# Altium PCB BigStructuralPCB.PcbDoc
Units mm, origin at the board's own origin, x right, y up, seen from the top; angles counter-clockwise.
Board outline 440 x 55 mm, 2 copper layers (Top Layer, Bottom Layer); 15 components, 18 nets, 141 pads, 122 vias.
Unrouted connection lines stored in the file: 14.
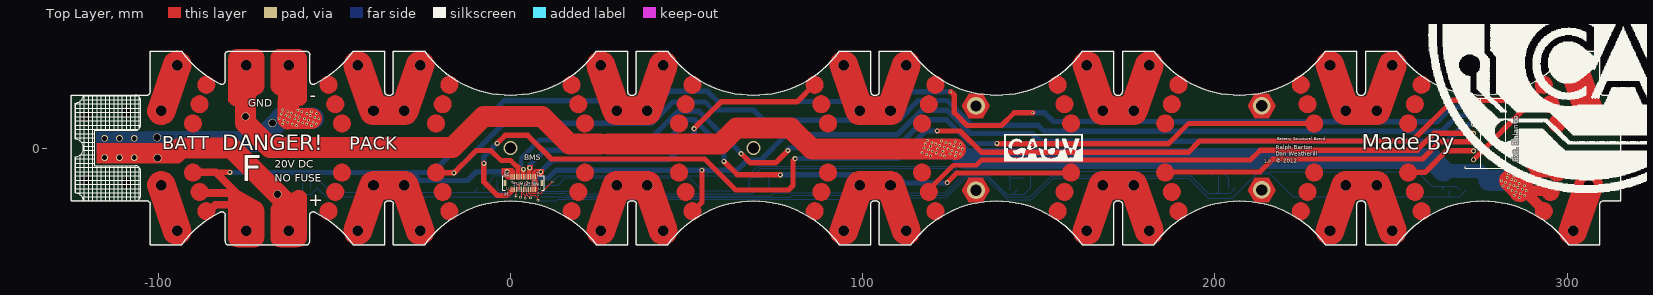
[diagram p0: Top Layer view]
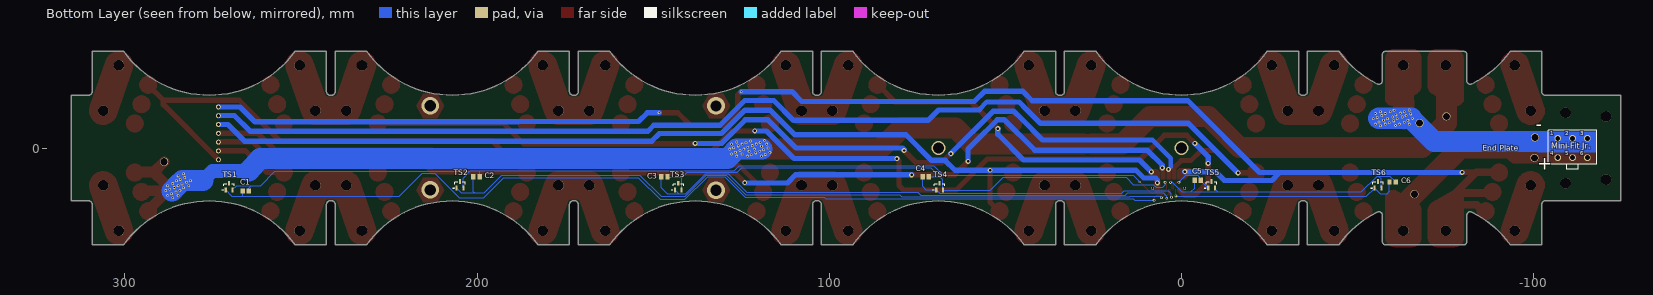
[diagram p1: Bottom Layer view, seen from below]

## Layer stack, top to bottom
Top Layer: signal copper 0.0356
Dielectric: dielectric 0.32, FR-4, Dk 4.8
Bottom Layer: signal copper 0.0356

## Board outline
657 vertices, not listed, extent -124.75,-27.5 315.25,27.5

## Design rules (kind name [scope] priority, off if disabled: settings)
Clearance [All] p1: gap=0.15
ComponentClearance [All] p1: gap=0.25 collisioncheckmode=3 verticalgap=0.25 showdistances=FALSE
HoleSize [All] p1: absolutevalues=TRUE maxlimit=10 minlimit=0.2 maxpercent=80.000 minpercent=20.000
HoleToHoleClearance [All] p1: gap=0.25 allowstackedmicrovias=TRUE
MinimumAnnularRing [All] p1: minimumring=0.15
MinimumSolderMaskSliver [All] p1: minsoldermaskwidth=0.125
PlaneClearance [All] p1: clearance=0.25
PlaneConnect [All] p1: planeconnectstyle=Relief reliefexpansion=0.5 reliefentries=4 reliefconductorwidth=0.25 reliefairgap=0.25
PolygonConnect [All] p1: connectstyle=Relief reliefconductorwidth=0.25 reliefentries=4 polygonreliefangle="90 Angle"
RoutingVias [All] p1: holewidth=0.3 width=0.6 viastyle="Through Hole" minholewidth=0.3 minwidth=0.6 maxholewidth=0.4 maxwidth=0.8
SilkToSilkClearance [All] p1: silktosilkclearance=0.25
SilkscreenOverComponentPads [All] p1: minsilkscreentomaskgap=0.125
SolderMaskExpansion [All] p1: expansion=0.125
Width "CAN Power" [InNet('CAN_POWER')] p1: maxlimit=10 minlimit=0.2 preferedwidth=2
Width Power [InNetClass('Power')] p2: maxlimit=10 minlimit=0.25 preferedwidth=0.5
Width General [All] p3: maxlimit=10 minlimit=0.2 preferedwidth=0.25
20 further rules are at their usual default settings.

## Classes and differential pairs
net class ReallyBigPower: BATT+ BATT- PACK+ PACK-
net class VoltSense: V1 V2 V3 V4 V5
net class TempSense: TSN1 TSN2 TSN3 TSP1 TSP2 TSP3 TSP4 TSP5 TSP6

## Components (designator, comment, footprint, x,y, rotation, side; value= is the part's Value field where it differs from the comment)
BMS "Comment" DF12-30DS-0.5V 3.666,-9.936 r180 top locked
C1 "" C0805 265.684,-12.192 r0 bottom
C2 "" C0805 200.152,-8.128 r0 bottom
C3 "" C0805 146.812,-8.128 r0 bottom
C4 "" C0805 72.644,-8.128 r0 bottom
C5 "" C0805 -4.572,-9.144 r0 bottom
C6 "" C0805 -59.944,-9.652 r180 bottom
"End Plate" "Comment" 39-28-1063 -106.806,2.764 r180 bottom
"Ext. Balance" "Comment" "JST XH 7 pin" 273.414,-3.332 r90 top
TS1 "Comment" SOT95P230X110-3N 270.366,-10.952 r90 bottom
TS2 "Comment" SOT95P230X110-3N 204.834,-10.444 r90 bottom
TS3 "Comment" SOT95P230X110-3N 142.858,-10.952 r90 bottom
TS4 "Comment" SOT95P230X110-3N 68.69,-10.952 r90 bottom
TS5 "Comment" SOT95P230X110-3N -8.526,-10.444 r90 bottom
TS6 "Comment" SOT95P230X110-3N -55.77,-10.444 r90 bottom

## Footprints (in the part's own frame and the unit in brackets; to place one, negate y for a bottom-side part, rotate by r counter-clockwise, add the part's x,y. Pads: shape width x height; smd on the part's side, far side on the other; paste and mask are expansions set on the pad)
39-28-1063 [mm] "MOLEX - 39-28-1063 - HEADER, MINI-FIT, 6WAY"
  round 1.9 hole 1.4: 1(0,0) 2(4.2,0) 3(8.4,0) PACK+(0,-5.5) PACK+(4.2,-5.5) PACK+(8.4,-5.5)
  silkscreen extent -2.72,-8.75 11.1,2.3, body extent -3.1,-8.75 11.5,2.25, height 12.8
C0805 [mm] "KEMET - C0805C104K5RACTU - CAPACITOR, 0805, 100NF, 50V, X7R"
  rect 1.25x1.5 smd: 1(-0.889,0) 2(0.861,0)
  body extent -1.12,-0.72 1.09,0.72, height 1
DF12-30DS-0.5V [mm] "HRS (HIROSE) - DF12-30DS-0.5V(86) - RECEPTACLE, 3.5-5MM HEIGHT, 30WAY"
  rect 0.25x1.6 smd mask+0.08: 1(-3.5,-1.8) 2(-3.5,1.8) 3(-3,-1.8) 4(-3,1.8) 5(-2.5,-1.8) 6(-2.5,1.8) 7(-2,-1.8) 8(-2,1.8) 9(-1.5,-1.8) 10(-1.5,1.8) 11(-1,-1.8) 12(-1,1.8) 13(-0.5,-1.8) 14(-0.5,1.8) 15(0,-1.8) 16(0,1.8) 17(0.5,-1.8) 18(0.5,1.8) 19(1,-1.8) 20(1,1.8) 21(1.5,-1.8) 22(1.5,1.8) 23(2,-1.8) 24(2,1.8) 25(2.5,-1.8) 26(2.5,1.8) 27(3,-1.8) 28(3,1.8) 29(3.5,-1.8) 30(3.5,1.8)
  rect 0.8x1.8 smd: ""(-5.2,0) ""(5.2,0)
  round 0.85 hole 0.6: ""(-4.55,1.5) ""(4.55,1.5)
  silkscreen extent -5.9,-2.1 5.9,2.1, body extent -5.3,-2.3 5.3,2.3, height 2.68
"JST XH 7 pin" [mil]
  round 55 hole 35: 1(0,0) 2(98.43,0) 3(196.85,0) 4(295.28,0) 5(393.7,0) 6(492.13,0) 7(590.55,0)
  silkscreen extent -94,-362 685,91
SOT95P230X110-3N [mm] "SOT23, 3-Leads, Body 3.0x2.5mm (max), Pitch 0.95mm, IPC Medium Density"
  rect 1.4x0.6 smd: 1(-0.95,0.95) 2(-0.95,-0.95) 3(0.95,0)
  silkscreen extent -1.07,-1.5 0.7,1.93, body extent -0.7,-1.5 0.7,1.5, height 1.1

## Free pads (board coordinates)
  round 3 hole 3: 1(-120.512,-9) 1(-120.512,9) 1(-109.012,-10) 1(-109.012,10) 1(-99.117,-10.595) 1(-99.117,10.595) 1(-94.645,-23.5) 1(-94.645,23.5) 1(-75.023,-23.5) 1(-75.023,23.5) 1(-62.977,-23.5) 1(-62.977,23.5) 1(-43.355,-23.5) 1(-43.355,23.5) 1(-38.883,-10.595) 1(-38.883,10.595) 1(-30.117,-10.595) 1(-30.117,10.595) 1(-25.645,-23.5) 1(-25.645,23.5) 1(25.645,-23.5) 1(25.645,23.5) 1(30.117,-10.595) 1(30.117,10.595) 1(38.883,-10.595) 1(38.883,10.595) 1(43.355,-23.5) 1(43.355,23.5) 1(94.645,-23.5) 1(94.645,23.5) 1(99.117,-10.595) 1(99.117,10.595) 1(107.883,-10.595) 1(107.883,10.595) 1(112.355,-23.5) 1(112.355,23.5) 1(163.645,-23.5) 1(163.645,23.5) 1(168.117,-10.595) 1(168.117,10.595) 1(176.883,-10.595) 1(176.883,10.595) 1(181.355,-23.5) 1(181.355,23.5) 1(232.645,-23.5) 1(232.645,23.5) 1(237.117,-10.595) 1(237.117,10.595) 1(245.883,-10.595) 1(245.883,10.595) 1(250.355,-23.5) 1(250.355,23.5) 1(301.645,-23.5) 1(301.645,23.5) 1(306.117,-10.595) 1(306.117,10.595)
  round 2.3 hole 2: 1(-100.3,3) 1(-100.2,-2.8) 1(-75.193,9) 1(-67.6,7.1) 1(-66.11,-13.118) 1(288.8,-3.9)
  round 4 hole 3: 1(0,0) 1(69,0)

## Via types
v1: diameter 0.8, hole 0.4, Top Layer to Bottom Layer, tented both sides, 98 vias
v2: diameter 1.4, hole 0.7, Top Layer to Bottom Layer, tented both sides, 17 vias
v3: diameter 5, hole 3.2, Top Layer to Bottom Layer, tented both sides, 4 vias
v4: diameter 1.4, hole 0.7, Top Layer to Bottom Layer, 2 vias
v5: diameter 0.6, hole 0.3, Top Layer to Bottom Layer, tented both sides, 1 vias

## Nets (pads, with @x,y where several pads share a name; then routed paths per layer and width w, separated by ;. In a path a pad name is that pad's centre, name@x,y a point inside that pad or via, vN(x,y) a via of type N, cw(c..) or ccw(c..) an arc to the next point about the centre after c; other vN are vias at no path point)
BATT+: "Ext. Balance.7" BMS.25 BMS.27 BMS.29 pad.1@-75.023,-23.5 | length 447.3
  Top Layer w1.5: -83.708,-6.895 -79.705,-6.895 v2(-79.675,-6.925) ; v1(125,16) 126,15 126,10 129.6,6.4 139.4,6.4 143,10 v1(148.3,10)
  Top Layer w2.2: -90.152,-6.895 -83.708,-6.895 -76.038,-14.565 ; -88.656,-12.801 -79.643,-12.801 -78.071,-14.373 ; -86.777,-17.173 -84.782,-17.173 -83.747,-16.138 -77.188,-16.138 -77.112,-16.214
  Bottom Layer w1.5: v2(-79.675,-6.925) -22.175,-6.925 -1.826,13.423 42.373,13.423 45.05,16.1 55.95,16.1 58.85,13.2 107.8,13.2 110.6,16 124.3,16 v1(125,16) ; -27.55,-7.3 -25.65,-9.2 -12.15,-9.2 -9.65,-6.7 v2(-0.95,-6.7) ; v1(148.3,10) 151.65,10 154.15,7.5 188.35,7.5 188.425,7.425 263.05,7.425 267.293,11.668 273.414,11.668
BATT-: "Ext. Balance.1" BMS.26 BMS.28 BMS.30 pad.1@288.8,-3.9 pad.1@-75.023,23.5 pad.1@-75.193,9 | length 919.9
  Top Layer w0.254: 283.563,-12.153 cw(c286.567,-12.153) 284.443,-10.028 ; 283.563,-12.153 cw(c286.567,-12.153) 284.443,-10.028 ; 283.563,-12.153 cw(c286.567,-12.153) 284.443,-10.028 ; 283.563,-12.153 cw(c286.567,-12.153) 284.443,-10.028 ; 283.563,-12.153 ccw(c286.567,-12.153) 289.207,-13.587 ; 283.563,-12.153 ccw(c286.567,-12.153) 289.207,-13.587 ; 283.563,-12.153 cw(c286.567,-12.153) 284.443,-10.028 ; 283.563,-12.153 ccw(c286.567,-12.153) 289.207,-13.587 ; 283.563,-12.153 ccw(c286.567,-12.153) 289.207,-13.587 ; 283.563,-12.153 ccw(c286.567,-12.153) 289.207,-13.587 ; 284.443,-10.028 cw(c286.567,-12.153) 288.692,-10.028 ; 284.443,-10.028 cw(c286.567,-12.153) 288.692,-10.028 ; 284.443,-10.028 cw(c286.567,-12.153) 288.692,-10.028 ; 284.443,-10.028 cw(c286.567,-12.153) 288.692,-10.028 ; 284.443,-10.028 cw(c286.567,-12.153) 288.692,-10.028 ; 288.692,-10.028 cw(c286.567,-12.153) 289.572,-12.153 ; 288.692,-10.028 cw(c286.567,-12.153) 289.572,-12.153 ; 288.692,-10.028 cw(c286.567,-12.153) 289.572,-12.153 ; 288.692,-10.028 cw(c286.567,-12.153) 289.572,-12.153 ; 288.692,-10.028 cw(c286.567,-12.153) 289.572,-12.153 ; 289.207,-13.587 ccw(c286.567,-12.153) 289.572,-12.153 ; 289.207,-13.587 ccw(c286.567,-12.153) 289.572,-12.153 ; 289.207,-13.587 ccw(c286.567,-12.153) 289.572,-12.153 ; 289.207,-13.587 ccw(c286.567,-12.153) 289.572,-12.153 ; 289.207,-13.587 ccw(c286.567,-12.153) 289.572,-12.153 ; 289.572,-12.153 ccw(c286.567,-12.153) 289.572,-12.153
  Top Layer w1.5: v2(-7.55,-4.35) -7.55,-9.6 -3.7,-13.45 -0.984,-13.45 0.533,-11.933 ; v2(-3.79,1.31) -1.5,3.6 4.9,3.6 11.6,-3.1 55.15,-3.1 63.95,-11.9 78.9,-11.9 80.2,-10.6 80.2,-3.6 v4(80.8,-3) ; v2(121.15,4.85) 127.65,4.85 133.7,-1.2 192.45,-1.2 195.65,2 255.95,2 267.5,13.55 289.05,13.55 ; 273.414,-3.332 289.05,12.304 289.05,13.55 ; 293.1,17.6 289.05,13.55
  Top Layer w2.2: 288.692,-10.028 286.567,-12.153 287.25,-12.153 287.773,-12.153 ; 289.207,-13.587 287.773,-12.153 ; 289.572,-12.153 287.773,-12.153 ; 294.935,-12.153 295.097,-12.315
  Top Layer w3: 288.692,-10.028 291.915,-6.805 ; pad.1@288.8,-3.9 291.705,-6.805 291.915,-6.805 ; 289.207,-13.587 292.587,-16.967 ; 289.572,-12.153 294.935,-12.153 ; 297.056,-6.805 291.915,-6.805
  Top Layer w6: -75.193,18.996 -75.193,7.055 -68.242,0.104 -16.496,0.104 -7.65,8.95 8.9,8.95 16.75,1.1 25.604,1.1 ; 27.646,1.15 59.6,1.15 64.15,5.7 79.55,5.7 85.55,-0.3 117.35,-0.3 118.65,-0.3 119.25,-0.3 120.75,-0.3 v1(121.25,-0.3) 121.85,-0.3 123.65,-0.3 v1(124.25,-0.3) 126.285,-0.3 126.332,-0.347 ; 283.65,-9.2 283.65,-9.236 284.443,-10.028 284.532,-10.118 286.182,-11.768 286.382,-11.968 286.567,-12.153
  Bottom Layer w1.5: v2(-7.55,-4.35) -7.55,-2.45 v2(-3.79,1.31) ; v4@80.6,-3 v4(80.8,-3) 110,-3 117.85,4.85 v2(121.15,4.85)
  Bottom Layer w4: 264.8,-6.55 275.1,-6.55 277.755,-9.205
  Bottom Layer w6: 119.05,-0.3 120.75,-0.3 v1(121.25,-0.3) 122.75,-0.3 123.65,-0.3 124.75,-0.3 126.285,-0.3 126.918,-0.932 128.932,-2.947 261.55,-2.947 264.8,-6.55 ; 277.755,-9.205 281.35,-9.205 282.95,-9.205 283.619,-9.205 284.532,-10.118 286.567,-12.153
  other v1: 286.35,-14.1 284.85,-13.5 287.85,-13.5 286.75,-13 285.45,-12.5 284.35,-12.1 288.35,-12.1 287.25,-11.7 283.35,-11.3 285.95,-11.2 281.85,-10.7 284.85,-10.7 287.85,-10.7 283.75,-10.2 286.35,-10.1 282.45,-9.7 281.35,-9.3 285.35,-9.3 284.25,-8.9 282.95,-8.4 284.85,-7.9 283.35,-7.3 119.25,-2.3 123.25,-2.3 126.25,-2.3 122.15,-1.9 118.15,-1.8 124.75,-1.7 127.75,-1.7 120.85,-1.4 116.85,-1.3 126.65,-1.2 119.75,-0.9 122.75,-0.9 125.35,-0.7 118.65,-0.5 128.25,-0.3 117.35,0 127.15,0.1 123.15,0.2 119.25,0.5 125.85,0.6 121.85,0.7 117.75,1.1 117.75,1.1 120.75,1.1 120.75,1.1 124.75,1.1 127.75,1.1 123.65,1.5 119.65,1.6 126.25,1.7 122.35,2 118.35,2.1
PACK+: "End Plate.PACK+" pad.1@-62.977,-23.5 pad.1@-66.11,-13.118 pad.1@-100.2,-2.8 | length 41.1
  Top Layer w6: -94.973,-1.345 -93.607,0.021 -79.249,0.021 -61.867,-17.361 -61.867,-17.566
PACK-: "End Plate.1" "End Plate.2" "End Plate.3" pad.1@-62.977,23.5 pad.1@-67.6,7.1 pad.1@-100.3,3 | length 67.7
  Top Layer w6: -63.35,8.4 -56.568,8.4 ; -63.132,8.2 -62.932,19.107
  Bottom Layer w6: -103.115,1.896 -71.628,1.896 -65.324,8.2 -65.324,8.45 -56,8.45
  other v1: -56.45,6.3 -60.75,6.4 -64.65,6.8 -61.85,6.8 -57.85,6.8 -55.05,6.8 -58.95,7.2 -63.25,7.3 -56.05,7.4 -60.25,7.7 -64.25,7.9 -57.35,7.9 -61.25,8.3 -58.45,8.3 -54.45,8.3 -65.55,8.4 -55.55,8.7 -62.65,8.8 -59.85,8.8 -63.75,9.2 -56.85,9.2 -60.85,9.4 -65.05,9.7 -57.85,9.8 -55.05,9.8 -62.15,9.9 -63.25,10.3 -63.25,10.3 -59.25,10.3 -56.45,10.3 -60.35,10.7 -64.65,10.8
TSN1: BMS.8 C1.1 C2.1 TS1.2 TS2.2 | length 279
  Top Layer w0.25: BMS.8 5.666,-12.716 5.85,-12.9 8.55,-12.9 v5(11.85,-9.6)
  Bottom Layer w0.25: v5(11.85,-9.6) 13.55,-7.9 13.65,-7.9
  Bottom Layer w0.254: 13.65,-7.9 55.8,-7.9 67.5,-7.9 70.25,-5.15 125.65,-5.15 127.096,-6.596 199.3,-6.596 ; C2.1@199.263,-7.9 199.263,-6.633 199.3,-6.596 ; TS2.2 203.884,-8.534 202.15,-6.8 ; 264.252,-10.848 264.795,-11.392 C1.1 ; TS1.2 268.314,-10.8 261.55,-10.8 257.55,-6.8 202.15,-6.8 ; 199.3,-6.596 201.946,-6.596 202.15,-6.8
TSN2: BMS.14 C3.1 C4.1 TS3.2 TS4.2 | length 159.6
  Top Layer w0.25: BMS.14 4.15,-11.72 4.15,-10.2 v1(4.65,-9.7)
  Bottom Layer w0.25: v1(4.65,-9.7) 4.65,-10.45 5.45,-11.25 7.1,-11.25 7.85,-10.5 13.6,-10.5 15.6,-8.5 16.05,-8.5 ; 45.1,-8.5 50.75,-8.5 54.45,-12.2 67.442,-12.2 TS4.2 67.75,-11.892 67.75,-9.05 68.458,-8.342 ; C4.1@71.755,-8.342 68.458,-8.342 ; 80.35,-5.8 71,-5.8 68.458,-8.342 ; 141.908,-8.508 145.543,-8.508 C3.1
  Bottom Layer w0.254: 16.05,-8.5 45.1,-8.5 ; 80.35,-5.8 125.037,-5.8 126.237,-7 140.4,-7 141.908,-8.508 TS3.2
TSN3: BMS.20 C5.2 C6.2 TS5.2 TS6.2 | length 78.9
  Top Layer w0.25: BMS.20 2.666,-10.234 v1(3.126,-9.774)
  Bottom Layer w0.25: -50.95,-12.6 -10.45,-12.6 ; -10.247,-12.397 -10.45,-12.6 ; v1(3.126,-9.774) 2.626,-9.774 -0.205,-12.605 -0.21,-12.6 -2.5,-12.6 -10.45,-12.6
  Bottom Layer w0.254: C6.2 -60.805,-9.635 -59.27,-8.1 -56.05,-8.1 ; TS6.2 -56.72,-8.77 -56.05,-8.1 ; -50.95,-12.6 -55.45,-8.1 -56.05,-8.1 ; -10.247,-12.397 -9.476,-11.626 TS5.2 ; C5.2 -3.711,-11.389 -2.5,-12.6
TSP1: BMS.10 C1.2 TS1.1 | length 286.7
  Top Layer w0.25: BMS.10 5.166,-12.816 5.75,-13.4 7,-13.4 7.75,-14.15 v1@7.75,-14.9
  Bottom Layer w0.25: v1@7.85,-14.95 13.132,-14.95 ; 100.55,-14.5 100.85,-14.5 101.25,-14.1 106.4,-14.1 ; 123.7,-14.1 129.5,-8.3 134.7,-8.3 141.127,-14.727 141.4,-14.727 ; 147.9,-14.727 154.027,-8.6 192.6,-8.6 198.3,-14.3 204.9,-14.3 211.9,-7.3 215.7,-7.3 222.2,-13.8 244.9,-13.8 ; 266.545,-13.745 C1.2
  Bottom Layer w0.254: 13.132,-14.95 13.582,-14.5 100.55,-14.5 ; 106.4,-14.1 123.7,-14.1 ; 141.4,-14.727 147.9,-14.727 ; 244.9,-13.8 269.418,-13.8 TS1.1
  other v1: 7.8,-14.85
TSP2: BMS.12 C2.2 TS2.1 | length 218.1
  Top Layer w0.25: BMS.12 4.666,-13.316 v1@5.394,-14.043
  Bottom Layer w0.25: v1(5.7,-14.1) 5.9,-13.9 14.732,-13.9 14.84,-14.008 ; 79.3,-14.008 79.908,-13.4 ; 145.15,-13.85 147.6,-13.85 153.6,-7.85 193.1,-7.85 198.15,-12.9
  Bottom Layer w0.254: 14.84,-14.008 79.3,-14.008 ; 79.908,-13.4 123.6,-13.4 129.102,-7.898 135.098,-7.898 141.05,-13.85 145.15,-13.85 ; 198.15,-12.9 200.5,-12.9 ; C2.2@201.013,-8 201.013,-12.387 200.5,-12.9 ; TS2.1 204.278,-12.9 200.5,-12.9
TSP3: BMS.16 C3.2 TS3.1 | length 157.7
  Top Layer w0.25: BMS.16 3.65,-11.752 3.65,-12.95 4.2,-13.5 v1(4.2,-14.25)
  Bottom Layer w0.25: v1(4.2,-14.25) 4.2,-13.75 5.1,-12.85 15.4,-12.85 16.05,-13.5
  Bottom Layer w0.254: 16.05,-13.5 73.9,-13.5 74.7,-12.7 123.3,-12.7 128.506,-7.494 135.265,-7.494 140.863,-13.092 142.3,-13.092 ; 142.308,-13.1 142.3,-13.092 ; TS3.1 142.618,-13.092 ; C3.2 147.673,-11.227 145.808,-13.092 142.618,-13.092 ; 142.3,-13.092 142.618,-13.092
TSP4: BMS.18 C4.2 TS4.1 | length 78.3
  Top Layer w0.25: v1(2.85,-13.95) 2.85,-13.8 3.15,-13.5 3.15,-11.752 BMS.18
  Bottom Layer w0.25: v1(2.85,-13.95) 2.85,-13.05 3.65,-12.25 16.35,-12.25 17.092,-12.992
  Bottom Layer w0.254: 17.092,-12.992 68.55,-12.992 TS4.1 69.738,-12 72.4,-12 73.505,-10.895 C4.2
TSP5: BMS.22 C5.1 TS5.1 | length 14.1
  Top Layer w0.25: v1(0.75,-9.7) 0.85,-9.6 1.05,-9.8 1.55,-9.8 2.166,-10.416 BMS.22
  Bottom Layer w0.25: v1@0.65,-9.6 v1(0.75,-9.7)
  Bottom Layer w0.254: TS5.1 -5.461,-9.279 -5.461,-8.661 -4.7,-7.9 -1.05,-7.9 v1(0.75,-9.7)
TSP6: BMS.24 C6.1 TS6.1 | length 67.4
  Top Layer w0.25: v1(1.6,-13.6) 1.666,-13.534 BMS.24
  Bottom Layer w0.25: -5.15,-13.9 1.3,-13.9 v1(1.6,-13.6)
  Bottom Layer w0.254: C6.1 -59,-9.707 -59,-12.3 -58.2,-13.1 -56.526,-13.1 TS6.1 -52.314,-13.9 -5.15,-13.9
V1: "Ext. Balance.2" BMS.13 BMS.15 BMS.17 | length 270.4
  Top Layer w1.4: 187.3,1.7 192.6,7 228.25,7
  Top Layer w1.5: v4(65.5,-1.6) 68.1,-4.2 75.25,-4.2 v2(78.75,-0.7) ; v2(138.1,1.3) 138.2,1.2 186.8,1.2 187.3,1.7 ; 255.085,-6.909 259.618,-6.909 265.778,-0.749 273.331,-0.749 273.414,-0.832
  Bottom Layer w1.4: 3.05,-5.4 3.05,-2.95 8.3,2.3
  Bottom Layer w1.5: 8.45,2.3 39.45,2.3 45.45,8.3 47.55,10.4 53.5,10.4 v4(65.5,-1.6) ; v2(78.75,-0.7) 78.75,-0.5 79.25,0 109.4,0 117.4,8 123.85,8 130.55,1.3 v2(138.1,1.3)
  other v2: 3.7,-6.05
V2: "Ext. Balance.3" BMS.7 BMS.9 BMS.11 | length 262.1
  Top Layer w1.5: v2(60.6,-3.8) 64.4,-7.6 v2(76.6,-7.6) ; v2(124,-9.8) 126.7,-7.1 159.25,-7.1 ; 185.369,-6.784 212.715,-6.784 216.399,-3.1 258.9,-3.1 263.801,1.801 273.281,1.801 273.414,1.668
  Bottom Layer w1.5: v2(5.45,-5.65) 5.45,-4.9 9.75,-0.6 41.65,-0.6 50.25,8 52.3,8 58.6,1.7 60.6,-0.3 v2(60.6,-3.8) ; v2(76.6,-7.6) 109.55,-7.6 111.85,-9.9 v2@124,-9.9
V3: "Ext. Balance.4" BMS.1 BMS.3 BMS.5 | length 250.6
  Top Layer w1.4: 118.6,-12 121,-9.6 125.7,-4.9 132.25,-4.9 133.8,-3.35 210.1,-3.35 212.85,-0.6
  Top Layer w1.5: v2(52.15,5.5) 56.129,9.479 59.75,13.1 81.35,13.1 86.35,18.1 ; 212.85,-0.6 257.4,-0.6 262.168,4.168 273.414,4.168
  Bottom Layer w1.5: v2(8.55,-6.8) 11.95,-3.4 44.85,-3.4 52.15,3.9 v2(52.15,5.5)
V4: "Ext. Balance.5" BMS.2 BMS.4 BMS.6 | length 294
  Top Layer w1.5: 51.75,-18 54.352,-15.398 v2(54.352,-6.314)
  Bottom Layer w1.4: v2(6.85,-9.9) 6.85,-9 7.35,-8.5 10.75,-8.5 11.25,-8
  Bottom Layer w1.5: 11.25,-8 12.95,-6.3 v2@54.366,-6.3 ; v2(54.352,-6.314) 64.286,-6.314 67.1,-3.5 71,-3.5 78.3,3.8 109.85,3.8 116.8,10.75 123.95,10.75 130.6,4.1 148.245,4.1 150.4,1.945 265.963,1.945 270.686,6.668 273.414,6.668
V5: "Ext. Balance.6" BMS.19 BMS.21 BMS.23 | length 335.6
  Top Layer w1.4: -13.825,-4.85 -9.675,-0.7 -5.55,-0.7 -2.65,-3.6 0.1,-3.6 1.75,-5.25 2,-5.25
  Top Layer w1.5: -21.225,-7.05 -16.075,-7.05 v2(-16.05,-7.075) -13.825,-4.85
  Bottom Layer w1.4: 43.85,10.8 46.15,13.1 55.25,13.1 57.45,10.9 57.45,10.8 ; 149.8,6.45 151.45,4.8
  Bottom Layer w1.5: v2(-16.05,-7.075) -1.975,7 40.05,7 43.85,10.8 ; 57.45,10.8 69,10.8 71.95,7.85 110.1,7.85 115.75,13.5 124,13.5 131.05,6.45 149.8,6.45 ; 151.45,4.8 264.475,4.8 268.9,9.225 273.357,9.225 273.414,9.168
pads on no net: BMS. TS1.3 TS2.3 TS3.3 TS4.3 TS5.3 TS6.3
copper on no net:
  other v3: 132.15,-11.95 213.25,-11.9 132.15,11.95 213.25,12

## Polygon pours and split planes (outlines as drawn)
no net on Mechanical 3 (none): 290.858,-17.929 ccw(c293.358,-17.929) 293.358,-20.429 ccw(c293.358,-17.929) 295.858,-17.929 ccw(c293.358,-17.929) 293.358,-15.429 ccw(c293.358,-17.929)
no net on Top Overlay "Top Overlay-No Net" (hatched 90Degree grid 1.2 track 0.203): -121.232,-15 ccw(c-123.719,-15.25) -123.584,-12.754 -123.584,-2.496 ccw(c-123.719,0) -123.584,2.496 -123.584,12.754 ccw(c-123.719,15.25) -121.232,15 -106.512,15 cw(c-106.512,13.5) -105.012,13.5 -105.012,6.5 cw(c-106.512,6.5) -106.512,5 -118.012,5 -118.012,-5 -106.512,-5 cw(c-106.512,-6.5) -105.012,-6.5 -105.012,-13.5 cw(c-106.512,-13.5) -106.512,-15

## Other copper
Top Layer:
  rectangle net PACK+: -117.548,-4.464 -93.925,1.393
  region net V4: 7.55,-10.6 7.6,-10.6 7.8,-10.4 7.8,-9.15 7.55,-9.15
  region net V2: 4.7,-6.55 4.7,-4.9 6.35,-4.9
  region net V4: 6.05,-12.5 6.05,-9.35 6.25,-9.15 7.55,-9.15 7.55,-12.4 7.45,-12.5
  region net V3: 6.05,-8.9 6.05,-6.9 6.95,-6 9.4,-6 9.4,-7.3 8.7,-8 7.55,-8 7.55,-8.9
  region net V2: 4.55,-8.9 4.55,-6.7 6.35,-4.9 6.35,-6.2 5.75,-6.8 5.75,-8.9
  region net BATT+: 1.25,-8.9 -1.05,-8.9 -2.45,-7.5 -2.45,-5.7 0.65,-5.7 1.25,-6.3
  region net V5: 1.55,-6.5 1.55,-5.3 1.5,-4.9 2.75,-4.9 2.75,-6.5
  region net V5: 2.75,-8.9 2.75,-6.5 1.55,-6.5 1.55,-8.9
  region: 128.152,11.95 130.141,8.505 134.119,8.505 136.108,11.95 134.119,15.395 130.141,15.395
  region: 128.152,-11.95 130.141,-15.395 134.119,-15.395 136.108,-11.95 134.119,-8.505 130.141,-8.505
  region: 209.252,-11.95 211.241,-15.395 215.219,-15.395 217.208,-11.95 215.219,-8.505 211.241,-8.505
  region: 209.252,11.95 211.241,8.505 215.219,8.505 217.208,11.95 215.219,15.395 211.241,15.395
  region net V1: 3.05,-8.9 4.25,-8.9 4.25,-5.5 3.05,-5.5
  region net BATT-: 283.563,-12.153 ccw(c286.567,-12.153) 286.567,-15.158 ccw(c286.567,-12.153) 289.572,-12.153 ccw(c286.567,-12.153) 286.567,-9.148 286.575,-9.12 ccw(c286.575,-12.125) 283.57,-12.125
  region: 83.858,-17.929 ccw(c86.358,-17.929) 86.358,-20.429 ccw(c86.358,-17.929) 88.858,-17.929 ccw(c86.358,-17.929) 86.358,-15.429 ccw(c86.358,-17.929)
  region: 85.755,-12.455 ccw(c88.255,-12.455) 88.255,-14.955 ccw(c88.255,-12.455) 90.755,-12.455 ccw(c88.255,-12.455) 88.255,-9.955 ccw(c88.255,-12.455)
  region: 87.652,-6.981 ccw(c90.152,-6.981) 90.152,-9.481 ccw(c90.152,-6.981) 92.652,-6.981 ccw(c90.152,-6.981) 90.152,-4.481 ccw(c90.152,-6.981)
  region net V3: 83.858,17.929 ccw(c86.358,17.929) 86.358,15.429 ccw(c86.358,17.929) 88.858,17.929 ccw(c86.358,17.929) 86.358,20.429 ccw(c86.358,17.929)
  region: 85.755,12.455 ccw(c88.255,12.455) 88.255,9.955 ccw(c88.255,12.455) 90.755,12.455 ccw(c88.255,12.455) 88.255,14.955 ccw(c88.255,12.455)
  region: 87.652,6.981 ccw(c90.152,6.981) 90.152,4.481 ccw(c90.152,6.981) 92.652,6.981 ccw(c90.152,6.981) 90.152,9.481 ccw(c90.152,6.981)
  region net V3: 118.142,17.929 ccw(c120.642,17.929) 120.642,15.429 ccw(c120.642,17.929) 123.142,17.929 ccw(c120.642,17.929) 120.642,20.429 ccw(c120.642,17.929)
  region: 116.245,12.455 ccw(c118.745,12.455) 118.745,9.955 ccw(c118.745,12.455) 121.245,12.455 ccw(c118.745,12.455) 118.745,14.955 ccw(c118.745,12.455)
  region: 114.348,6.981 ccw(c116.848,6.981) 116.848,4.481 ccw(c116.848,6.981) 119.348,6.981 ccw(c116.848,6.981) 116.848,9.481 ccw(c116.848,6.981)
  region: 152.858,-17.929 ccw(c155.358,-17.929) 155.358,-20.429 ccw(c155.358,-17.929) 157.858,-17.929 ccw(c155.358,-17.929) 155.358,-15.429 ccw(c155.358,-17.929)
  region net V2: 156.652,-6.981 ccw(c159.152,-6.981) 159.152,-9.481 ccw(c159.152,-6.981) 161.652,-6.981 ccw(c159.152,-6.981) 159.152,-4.481 ccw(c159.152,-6.981)
  region: 152.858,17.929 ccw(c155.358,17.929) 155.358,15.429 ccw(c155.358,17.929) 157.858,17.929 ccw(c155.358,17.929) 155.358,20.429 ccw(c155.358,17.929)
  region: 154.755,12.455 ccw(c157.255,12.455) 157.255,9.955 ccw(c157.255,12.455) 159.755,12.455 ccw(c157.255,12.455) 157.255,14.955 ccw(c157.255,12.455)
  region: 183.348,6.981 ccw(c185.848,6.981) 185.848,4.481 ccw(c185.848,6.981) 188.348,6.981 ccw(c185.848,6.981) 185.848,9.481 ccw(c185.848,6.981)
  region: 187.142,17.929 ccw(c189.642,17.929) 189.642,15.429 ccw(c189.642,17.929) 192.142,17.929 ccw(c189.642,17.929) 189.642,20.429 ccw(c189.642,17.929)
  region: 185.245,12.455 ccw(c187.745,12.455) 187.745,9.955 ccw(c187.745,12.455) 190.245,12.455 ccw(c187.745,12.455) 187.745,14.955 ccw(c187.745,12.455)
  region: 221.858,-17.929 ccw(c224.358,-17.929) 224.358,-20.429 ccw(c224.358,-17.929) 226.858,-17.929 ccw(c224.358,-17.929) 224.358,-15.429 ccw(c224.358,-17.929)
  region: 223.755,-12.455 ccw(c226.255,-12.455) 226.255,-14.955 ccw(c226.255,-12.455) 228.755,-12.455 ccw(c226.255,-12.455) 226.255,-9.955 ccw(c226.255,-12.455)
  region: 225.652,-6.981 ccw(c228.152,-6.981) 228.152,-9.481 ccw(c228.152,-6.981) 230.652,-6.981 ccw(c228.152,-6.981) 228.152,-4.481 ccw(c228.152,-6.981)
  region net V1: 225.652,6.981 ccw(c228.152,6.981) 228.152,4.481 ccw(c228.152,6.981) 230.652,6.981 ccw(c228.152,6.981) 228.152,9.481 ccw(c228.152,6.981)
  region: 221.858,17.929 ccw(c224.358,17.929) 224.358,15.429 ccw(c224.358,17.929) 226.858,17.929 ccw(c224.358,17.929) 224.358,20.429 ccw(c224.358,17.929)
  region: 223.755,12.455 ccw(c226.255,12.455) 226.255,9.955 ccw(c226.255,12.455) 228.755,12.455 ccw(c226.255,12.455) 226.255,14.955 ccw(c226.255,12.455)
  region: 228.865,22.19 233.338,9.286 ccw(c237.117,10.595) 237.117,6.595 245.883,6.595 ccw(c245.883,10.595) 249.662,9.286 254.134,22.19 ccw(c250.355,23.5) 246.575,24.81 243.269,15.268 cw(c242.324,15.595) 242.324,14.595 240.676,14.595 cw(c240.676,15.595) 239.731,15.268 236.424,24.81 ccw(c232.645,23.5)
  region: 159.865,22.19 164.338,9.286 ccw(c168.117,10.595) 168.117,6.595 176.883,6.595 ccw(c176.883,10.595) 180.662,9.286 185.134,22.19 ccw(c181.355,23.5) 177.575,24.81 174.269,15.268 cw(c173.324,15.595) 173.324,14.595 171.676,14.595 cw(c171.676,15.595) 170.731,15.268 167.424,24.81 ccw(c163.645,23.5)
  region: 159.152,4.481 ccw(c159.152,6.981) 161.652,6.981 ccw(c159.152,6.981) 159.152,9.481 ccw(c159.152,6.981) 156.652,6.981 ccw(c159.152,6.981)
  region: 159.152,4.481 ccw(c159.152,6.981) 161.652,6.981 ccw(c159.152,6.981) 159.152,9.481 ccw(c159.152,6.981) 156.652,6.981 ccw(c159.152,6.981)
  region: 159.865,-22.19 164.338,-9.286 cw(c168.117,-10.595) 168.117,-6.595 176.883,-6.595 cw(c176.883,-10.595) 180.662,-9.286 185.134,-22.19 cw(c181.355,-23.5) 177.575,-24.81 174.269,-15.268 ccw(c173.324,-15.595) 173.324,-14.595 171.676,-14.595 ccw(c171.676,-15.595) 170.731,-15.268 167.424,-24.81 cw(c163.645,-23.5)
  region: 157.255,-14.955 ccw(c157.255,-12.455) 159.755,-12.455 ccw(c157.255,-12.455) 157.255,-9.955 ccw(c157.255,-12.455) 154.755,-12.455 ccw(c157.255,-12.455)
  region: 95.338,9.286 90.865,22.19 cw(c94.645,23.5) 98.424,24.81 101.731,15.268 ccw(c102.676,15.595) 102.676,14.595 104.324,14.595 ccw(c104.324,15.595) 105.269,15.268 108.575,24.81 cw(c112.355,23.5) 116.134,22.19 111.662,9.286 cw(c107.883,10.595) 107.883,6.595 99.117,6.595 cw(c99.117,10.595)
  region: 90.865,-22.19 95.338,-9.286 cw(c99.117,-10.595) 99.117,-6.595 107.883,-6.595 cw(c107.883,-10.595) 111.662,-9.286 116.134,-22.19 cw(c112.355,-23.5) 108.575,-24.81 105.269,-15.268 ccw(c104.324,-15.595) 104.324,-14.595 102.676,-14.595 ccw(c102.676,-15.595) 101.731,-15.268 98.424,-24.81 cw(c94.645,-23.5)
  region: 47.245,-12.455 ccw(c49.745,-12.455) 49.745,-14.955 ccw(c49.745,-12.455) 52.245,-12.455 ccw(c49.745,-12.455) 49.745,-9.955 ccw(c49.745,-12.455)
  region net V4: 49.142,-17.929 ccw(c51.642,-17.929) 51.642,-20.429 ccw(c51.642,-17.929) 54.142,-17.929 ccw(c51.642,-17.929) 51.642,-15.429 ccw(c51.642,-17.929)
  region: 14.858,-17.929 ccw(c17.358,-17.929) 17.358,-20.429 ccw(c17.358,-17.929) 19.858,-17.929 ccw(c17.358,-17.929) 17.358,-15.429 ccw(c17.358,-17.929)
  region: 16.755,-12.455 ccw(c19.255,-12.455) 19.255,-14.955 ccw(c19.255,-12.455) 21.755,-12.455 ccw(c19.255,-12.455) 19.255,-9.955 ccw(c19.255,-12.455)
  region: 18.652,-6.981 ccw(c21.152,-6.981) 21.152,-9.481 ccw(c21.152,-6.981) 23.652,-6.981 ccw(c21.152,-6.981) 21.152,-4.481 ccw(c21.152,-6.981)
  region: 45.348,6.981 ccw(c47.848,6.981) 47.848,4.481 ccw(c47.848,6.981) 50.348,6.981 ccw(c47.848,6.981) 47.848,9.481 ccw(c47.848,6.981)
  region: 47.245,12.455 ccw(c49.745,12.455) 49.745,9.955 ccw(c49.745,12.455) 52.245,12.455 ccw(c49.745,12.455) 49.745,14.955 ccw(c49.745,12.455)
  region: 49.142,17.929 ccw(c51.642,17.929) 51.642,15.429 ccw(c51.642,17.929) 54.142,17.929 ccw(c51.642,17.929) 51.642,20.429 ccw(c51.642,17.929)
  region: 18.652,6.981 ccw(c21.152,6.981) 21.152,4.481 ccw(c21.152,6.981) 23.652,6.981 ccw(c21.152,6.981) 21.152,9.481 ccw(c21.152,6.981)
  region: 16.755,12.455 ccw(c19.255,12.455) 19.255,9.955 ccw(c19.255,12.455) 21.755,12.455 ccw(c19.255,12.455) 19.255,14.955 ccw(c19.255,12.455)
  region: 14.858,17.929 ccw(c17.358,17.929) 17.358,15.429 ccw(c17.358,17.929) 19.858,17.929 ccw(c17.358,17.929) 17.358,20.429 ccw(c17.358,17.929)
  region: 26.338,9.286 21.865,22.19 cw(c25.645,23.5) 29.424,24.81 32.731,15.268 ccw(c33.676,15.595) 33.676,14.595 35.324,14.595 ccw(c35.324,15.595) 36.269,15.268 39.575,24.81 cw(c43.355,23.5) 47.134,22.19 42.662,9.286 cw(c38.883,10.595) 38.883,6.595 30.117,6.595 cw(c30.117,10.595)
  region: 21.865,-22.19 26.338,-9.286 cw(c30.117,-10.595) 30.117,-6.595 38.883,-6.595 cw(c38.883,-10.595) 42.662,-9.286 47.134,-22.19 cw(c43.355,-23.5) 39.575,-24.81 36.269,-15.268 ccw(c35.324,-15.595) 35.324,-14.595 33.676,-14.595 ccw(c33.676,-15.595) 32.731,-15.268 29.424,-24.81 cw(c25.645,-23.5)
  region: -47.135,-22.19 -42.663,-9.286 cw(c-38.883,-10.595) -38.883,-6.595 -30.117,-6.595 cw(c-30.117,-10.595) -26.338,-9.286 -21.866,-22.19 cw(c-25.645,-23.5) -29.425,-24.81 -32.731,-15.268 ccw(c-33.676,-15.595) -33.676,-14.595 -35.324,-14.595 ccw(c-35.324,-15.595) -36.269,-15.268 -39.576,-24.81 cw(c-43.355,-23.5)
  region: -42.663,9.286 -47.135,22.19 cw(c-43.355,23.5) -39.576,24.81 -36.269,15.268 ccw(c-35.324,15.595) -35.324,14.595 -33.676,14.595 ccw(c-33.676,15.595) -32.731,15.268 -29.425,24.81 cw(c-25.645,23.5) -21.866,22.19 -26.338,9.286 cw(c-30.117,10.595) -30.117,6.595 -38.883,6.595 cw(c-38.883,10.595)
  region: -19.858,17.929 ccw(c-17.358,17.929) -17.358,15.429 ccw(c-17.358,17.929) -14.858,17.929 ccw(c-17.358,17.929) -17.358,20.429 ccw(c-17.358,17.929)
  region: -19.858,-17.929 ccw(c-17.358,-17.929) -17.358,-20.429 ccw(c-17.358,-17.929) -14.858,-17.929 ccw(c-17.358,-17.929) -17.358,-15.429 ccw(c-17.358,-17.929)
  region: -21.755,-12.455 ccw(c-19.255,-12.455) -19.255,-14.955 ccw(c-19.255,-12.455) -16.755,-12.455 ccw(c-19.255,-12.455) -19.255,-9.955 ccw(c-19.255,-12.455)
  region: -23.652,6.981 ccw(c-21.152,6.981) -21.152,4.481 ccw(c-21.152,6.981) -18.652,6.981 ccw(c-21.152,6.981) -21.152,9.481 ccw(c-21.152,6.981)
  region: -21.755,12.455 ccw(c-19.255,12.455) -19.255,9.955 ccw(c-19.255,12.455) -16.755,12.455 ccw(c-19.255,12.455) -19.255,14.955 ccw(c-19.255,12.455)
  region: -52.245,12.455 ccw(c-49.745,12.455) -49.745,9.955 ccw(c-49.745,12.455) -47.245,12.455 ccw(c-49.745,12.455) -49.745,14.955 ccw(c-49.745,12.455)
  region: -54.142,17.929 ccw(c-51.642,17.929) -51.642,15.429 ccw(c-51.642,17.929) -49.142,17.929 ccw(c-51.642,17.929) -51.642,20.429 ccw(c-51.642,17.929)
  region: -50.348,6.981 ccw(c-47.848,6.981) -47.848,4.481 ccw(c-47.848,6.981) -45.348,6.981 ccw(c-47.848,6.981) -47.848,9.481 ccw(c-47.848,6.981)
  region: -54.142,-17.929 ccw(c-51.642,-17.929) -51.642,-20.429 ccw(c-51.642,-17.929) -49.142,-17.929 ccw(c-51.642,-17.929) -51.642,-15.429 ccw(c-51.642,-17.929)
  region: -52.245,-12.455 ccw(c-49.745,-12.455) -49.745,-14.955 ccw(c-49.745,-12.455) -47.245,-12.455 ccw(c-49.745,-12.455) -49.745,-9.955 ccw(c-49.745,-12.455)
  region: -50.348,-6.981 ccw(c-47.848,-6.981) -47.848,-9.481 ccw(c-47.848,-6.981) -45.348,-6.981 ccw(c-47.848,-6.981) -47.848,-4.481 ccw(c-47.848,-6.981)
  region: 228.865,-22.19 233.338,-9.286 cw(c237.117,-10.595) 237.117,-6.595 245.883,-6.595 cw(c245.883,-10.595) 249.662,-9.286 254.134,-22.19 cw(c250.355,-23.5) 246.575,-24.81 243.269,-15.268 ccw(c242.324,-15.595) 242.324,-14.595 240.676,-14.595 ccw(c240.676,-15.595) 239.731,-15.268 236.424,-24.81 cw(c232.645,-23.5)
  region net V5: -23.652,-6.981 ccw(c-21.152,-6.981) -21.152,-9.481 ccw(c-21.152,-6.981) -18.652,-6.981 ccw(c-21.152,-6.981) -21.152,-4.481 ccw(c-21.152,-6.981)
  region net V4: 45.348,-6.981 ccw(c47.848,-6.981) 47.848,-9.481 ccw(c47.848,-6.981) 50.348,-6.981 ccw(c47.848,-6.981) 47.848,-4.481 ccw(c47.848,-6.981)
  region: 187.142,-17.929 ccw(c189.642,-17.929) 189.642,-20.429 ccw(c189.642,-17.929) 192.142,-17.929 ccw(c189.642,-17.929) 189.642,-15.429 ccw(c189.642,-17.929)
  region: 185.245,-12.455 ccw(c187.745,-12.455) 187.745,-14.955 ccw(c187.745,-12.455) 190.245,-12.455 ccw(c187.745,-12.455) 187.745,-9.955 ccw(c187.745,-12.455)
  region net V2: 183.348,-6.981 ccw(c185.848,-6.981) 185.848,-9.481 ccw(c185.848,-6.981) 188.348,-6.981 ccw(c185.848,-6.981) 185.848,-4.481 ccw(c185.848,-6.981)
  region: 118.142,-17.929 ccw(c120.642,-17.929) 120.642,-20.429 ccw(c120.642,-17.929) 123.142,-17.929 ccw(c120.642,-17.929) 120.642,-15.429 ccw(c120.642,-17.929)
  region net V3: 116.245,-12.455 ccw(c118.745,-12.455) 118.745,-14.955 ccw(c118.745,-12.455) 121.245,-12.455 ccw(c118.745,-12.455) 118.745,-9.955 ccw(c118.745,-12.455)
  region net V3: 114.348,-6.981 ccw(c116.848,-6.981) 116.848,-9.481 ccw(c116.848,-6.981) 119.348,-6.981 ccw(c116.848,-6.981) 116.848,-4.481 ccw(c116.848,-6.981)
  region net BATT-: 290.858,-17.929 ccw(c293.358,-17.929) 293.358,-20.429 ccw(c293.358,-17.929) 295.858,-17.929 ccw(c293.358,-17.929) 293.358,-15.429 ccw(c293.358,-17.929)
  region net BATT-: 292.755,-12.455 ccw(c295.255,-12.455) 295.255,-14.955 ccw(c295.255,-12.455) 297.755,-12.455 ccw(c295.255,-12.455) 295.255,-9.955 ccw(c295.255,-12.455)
  region net BATT-: 294.652,-6.981 ccw(c297.152,-6.981) 297.152,-9.481 ccw(c297.152,-6.981) 299.652,-6.981 ccw(c297.152,-6.981) 297.152,-4.481 ccw(c297.152,-6.981)
  region net BATT-: -80.05,13.344 ccw(c-77.718,14.494) -77.852,11.897 ccw(c-77.986,14.494) -76.686,12.242 -71.15,15.438 ccw(c-72.45,17.69) -69.85,17.69 -69.85,25.494 ccw(c-72.45,25.494) -72.45,28.094 -77.45,28.094 ccw(c-77.45,25.494) -80.05,25.494
  region net PACK-: -66.777,15.444 cw(c-65.477,17.696) -68.077,17.696 -68.077,25.5 cw(c-65.477,25.5) -65.477,28.1 -60.477,28.1 cw(c-60.477,25.5) -57.877,25.5 -57.877,13.35 cw(c-60.209,14.5) -60.075,11.903 cw(c-59.941,14.5) -61.241,12.248
  region net PACK+: -68.077,-25.5 ccw(c-65.477,-25.5) -65.477,-28.1 -60.477,-28.1 ccw(c-60.477,-25.5) -57.877,-25.5 -57.877,-13.35 ccw(c-60.209,-14.5) -60.075,-11.903 ccw(c-59.941,-14.5) -61.241,-12.248 -66.777,-15.445 ccw(c-65.477,-17.696) -68.077,-17.696
  region net BATT+: -80.123,-25.5 -80.123,-13.35 cw(c-77.791,-14.5) -77.925,-11.903 cw(c-78.059,-14.5) -76.759,-12.248 -71.223,-15.445 cw(c-72.523,-17.696) -69.923,-17.696 -69.923,-25.5 cw(c-72.523,-25.5) -72.523,-28.1 -77.523,-28.1 cw(c-77.523,-25.5)
  region: -98.425,-24.81 -102.897,-11.905 cw(c-99.117,-10.595) -95.338,-9.286 -90.866,-22.19 cw(c-94.645,-23.5)
  region net BATT+: -88.858,-17.929 ccw(c-86.358,-17.929) -86.358,-20.429 ccw(c-86.358,-17.929) -83.858,-17.929 ccw(c-86.358,-17.929) -86.358,-15.429 ccw(c-86.358,-17.929)
  region net BATT+: -88.255,-14.955 cw(c-88.255,-12.455) -90.755,-12.455 cw(c-88.255,-12.455) -88.255,-9.955 cw(c-88.255,-12.455) -85.755,-12.455 cw(c-88.255,-12.455)
  region net BATT+: -90.152,-9.481 cw(c-90.152,-6.981) -92.652,-6.981 cw(c-90.152,-6.981) -90.152,-4.481 cw(c-90.152,-6.981) -87.652,-6.981 cw(c-90.152,-6.981)
  region net BATT+: -86.358,15.429 cw(c-86.358,17.929) -88.858,17.929 cw(c-86.358,17.929) -86.358,20.429 cw(c-86.358,17.929) -83.858,17.929 cw(c-86.358,17.929)
  region net BATT+: -88.255,9.955 cw(c-88.255,12.455) -90.755,12.455 cw(c-88.255,12.455) -88.255,14.955 cw(c-88.255,12.455) -85.755,12.455 cw(c-88.255,12.455)
  region net BATT+: -90.152,4.481 cw(c-90.152,6.981) -92.652,6.981 cw(c-90.152,6.981) -90.152,9.481 cw(c-90.152,6.981) -87.652,6.981 cw(c-90.152,6.981)
  region: -102.897,11.905 ccw(c-99.117,10.595) -95.338,9.286 -90.866,22.19 ccw(c-94.645,23.5) -98.425,24.81
  region: -98.377,24.793 cw(c-94.645,23.5) -90.696,23.5 cw(c-94.645,23.5) -90.913,22.207 ccw(c-90.866,22.19) -90.818,22.174 ccw(c-94.645,23.5) -90.595,23.5 ccw(c-94.645,23.5) -98.472,24.826 ccw(c-98.425,24.81)
  region net V1: 256.142,-17.929 ccw(c258.642,-17.929) 258.642,-20.429 ccw(c258.642,-17.929) 261.142,-17.929 ccw(c258.642,-17.929) 258.642,-15.429 ccw(c258.642,-17.929)
  region net V1: 254.245,-12.455 ccw(c256.745,-12.455) 256.745,-14.955 ccw(c256.745,-12.455) 259.245,-12.455 ccw(c256.745,-12.455) 256.745,-9.955 ccw(c256.745,-12.455)
  region net V1: 252.348,-6.981 ccw(c254.848,-6.981) 254.848,-9.481 ccw(c254.848,-6.981) 257.348,-6.981 ccw(c254.848,-6.981) 254.848,-4.481 ccw(c254.848,-6.981)
  region: 256.142,17.929 ccw(c258.642,17.929) 258.642,15.429 ccw(c258.642,17.929) 261.142,17.929 ccw(c258.642,17.929) 258.642,20.429 ccw(c258.642,17.929)
  region: 254.245,12.455 ccw(c256.745,12.455) 256.745,9.955 ccw(c256.745,12.455) 259.245,12.455 ccw(c256.745,12.455) 256.745,14.955 ccw(c256.745,12.455)
  region: 252.348,6.981 ccw(c254.848,6.981) 254.848,4.481 ccw(c254.848,6.981) 257.348,6.981 ccw(c254.848,6.981) 254.848,9.481 ccw(c254.848,6.981)
  region: 252.348,6.981 ccw(c254.848,6.981) 254.848,4.481 ccw(c254.848,6.981) 257.348,6.981 ccw(c254.848,6.981) 254.848,9.481 ccw(c254.848,6.981)
  region: 252.348,6.981 ccw(c254.848,6.981) 254.848,4.481 ccw(c254.848,6.981) 257.348,6.981 ccw(c254.848,6.981) 254.848,9.481 ccw(c254.848,6.981)
  region net BATT-: 294.652,6.981 ccw(c297.152,6.981) 297.152,4.481 ccw(c297.152,6.981) 299.652,6.981 ccw(c297.152,6.981) 297.152,9.481 ccw(c297.152,6.981)
  region net BATT-: 292.755,12.455 ccw(c295.255,12.455) 295.255,9.955 ccw(c295.255,12.455) 297.755,12.455 ccw(c295.255,12.455) 295.255,14.955 ccw(c295.255,12.455)
  region net BATT-: 290.858,17.929 ccw(c293.358,17.929) 293.358,15.429 ccw(c293.358,17.929) 295.858,17.929 ccw(c293.358,17.929) 293.358,20.429 ccw(c293.358,17.929)
  region: 297.866,22.19 302.338,9.286 ccw(c306.117,10.595) 309.897,11.905 305.424,24.81 ccw(c301.645,23.5)
  region: 297.866,-22.19 ccw(c301.645,-23.5) 305.424,-24.81 309.897,-11.905 ccw(c306.117,-10.595) 302.338,-9.286
Bottom Layer:
  rectangle net PACK-: -117.598,-1.27 -101.063,4.743

## Silkscreen, mask and mechanical layers (free items; w line width, h text height)
Top Overlay:
  drawing of 688 lines, arcs and shapes, not listed
  text "-" at -57.05,12 h6.35
  text "GND" at -74.5,10.8 h3.81
  text "Battery Structural Board" at 217.681,1.8 h1.5
  text "Ralph Barton" at 217.3,-0.8 h2
  text "BATT" at -98.8,-1.65 h6.35
  text "PACK" at -45.8,-1.7 h6.35
  text "Made By" at 241.6,-2 h7.62
  text "DANGER!" at -81.8,-2.15 h7.62
  text "Dan Weatherill" at 217.3,-2.6 h2
  text "1.0" at 214.05,-4.55 h1.5
  text "© 2012" at 217.3,-4.6 h2
  text "20V DC" at -66.9,-6.5 h3.81
  text "NO FUSE" at -66.9,-10.4 h3.81
  text "F" at -76.45,-11.8 h12.7
  text "+" at -57.35,-17.8 h6.35
Bottom Overlay:
  text "-" at -100.6,3.8 h6.35
  text "+" at -101,-7.5 h6.35
Top Solder:
  drawing of 97 lines, arcs and shapes, not listed
Mechanical 3:
  drawing of 1010 lines, arcs and shapes, not listed
Mechanical 4:
  circle w0.254: c119.25,2.5 r1
  circle w0.254: c119.35,2.5 r2
  circle w0.254: c117.75,-0.9 r1
  circle w0.254: c117.85,-0.9 r2
  circle w0.254: c121.25,-2.3 r1
  circle w0.254: c121.15,-2.3 r2
  circle w0.254: c122.75,1.1 r1
  circle w0.254: c122.65,1.1 r2
  circle w0.254: c126.25,-0.3 r1
  circle w0.254: c126.15,-0.3 r2
  circle w0.254: c-64.65,8.8 r1
  circle w0.254: c-64.65,8.9 r2
  circle w0.254: c-61.25,10.3 r1
  circle w0.254: c-61.25,10.4 r2
  circle w0.254: c-59.85,6.8 r1
  circle w0.254: c-59.85,6.9 r2
  circle w0.254: c-56.45,8.3 r1
  circle w0.254: c-56.45,8.4 r2
  circle w0.254: c-61.15,6.3 r2
  circle w0.254: c-59.65,9.7 r2
  circle w0.254: c283.35,-9.3 r1
  circle w0.254: c283.45,-9.3 r2
  circle w0.254: c286.35,-12.1 r1
  circle w0.254: c286.45,-12.1 r2
  circle w0.254: c275.55,-21.4 r2
  circle w0.254: c275.45,-21.4 r1
  lines w0.127: 40.025,-32.55 40.025,27.625 43.25,30.85 93.825,30.85 93.825,-33.475 93.15,-34.15 41.625,-34.15 40.025,-32.55 ; 73.8,3.625 73.8,16.9 73.925,17.025 80.975,17.025 80.975,3.775 80.8,3.6 73.825,3.6 73.8,3.625

## Dimensions
132.13,-11.95 to 132.95,-22.5 on Mechanical 3
-102.25,-27.5 to -80.124,-13.35 on Mechanical 4
271.75,-21.6 to 271.85,-21 on Mechanical 4

## Text inside footprints (layer, text, board x,y; h text height)
BMS: Top Overlay "30" at -0.334,-12.336 h1.5 r180; Top Overlay "29" at -0.334,-6.536 h1.5 r180; Top Overlay "2" at 8.266,-12.336 h1.5 r180; Top Overlay "1" at 8.066,-6.536 h1.5 r180; Top Overlay "RECEPTACLE" at 8.116,-9.436 h1.5 r180
"End Plate": Bottom Overlay "6" at -113.206,-2.536 h2; Bottom Overlay "5" at -108.906,-2.436 h2; Bottom Overlay "4" at -104.706,-2.436 h2; Bottom Overlay "3" at -113.206,3.164 h2; Bottom Overlay "2" at -108.906,3.164 h2; Bottom Overlay "1" at -104.706,3.164 h2; Bottom Overlay "Mini-Fit Jr." at -104.906,-0.736 h2.8